# Altium PCB MSS_PCB.PcbDoc (part 2 of 2)
Units mm, origin at the board's own origin, x right, y up, seen from the top; angles counter-clockwise.
Board outline 160 x 110 mm, 4 copper layers (L1 (Signal), L2 (GND), L3 (GND), L4 (Signal)), stack 1.369 mm thick; 208 components, 129 nets, 584 pads, 198 vias.
Unrouted connection lines stored in the file: 1.
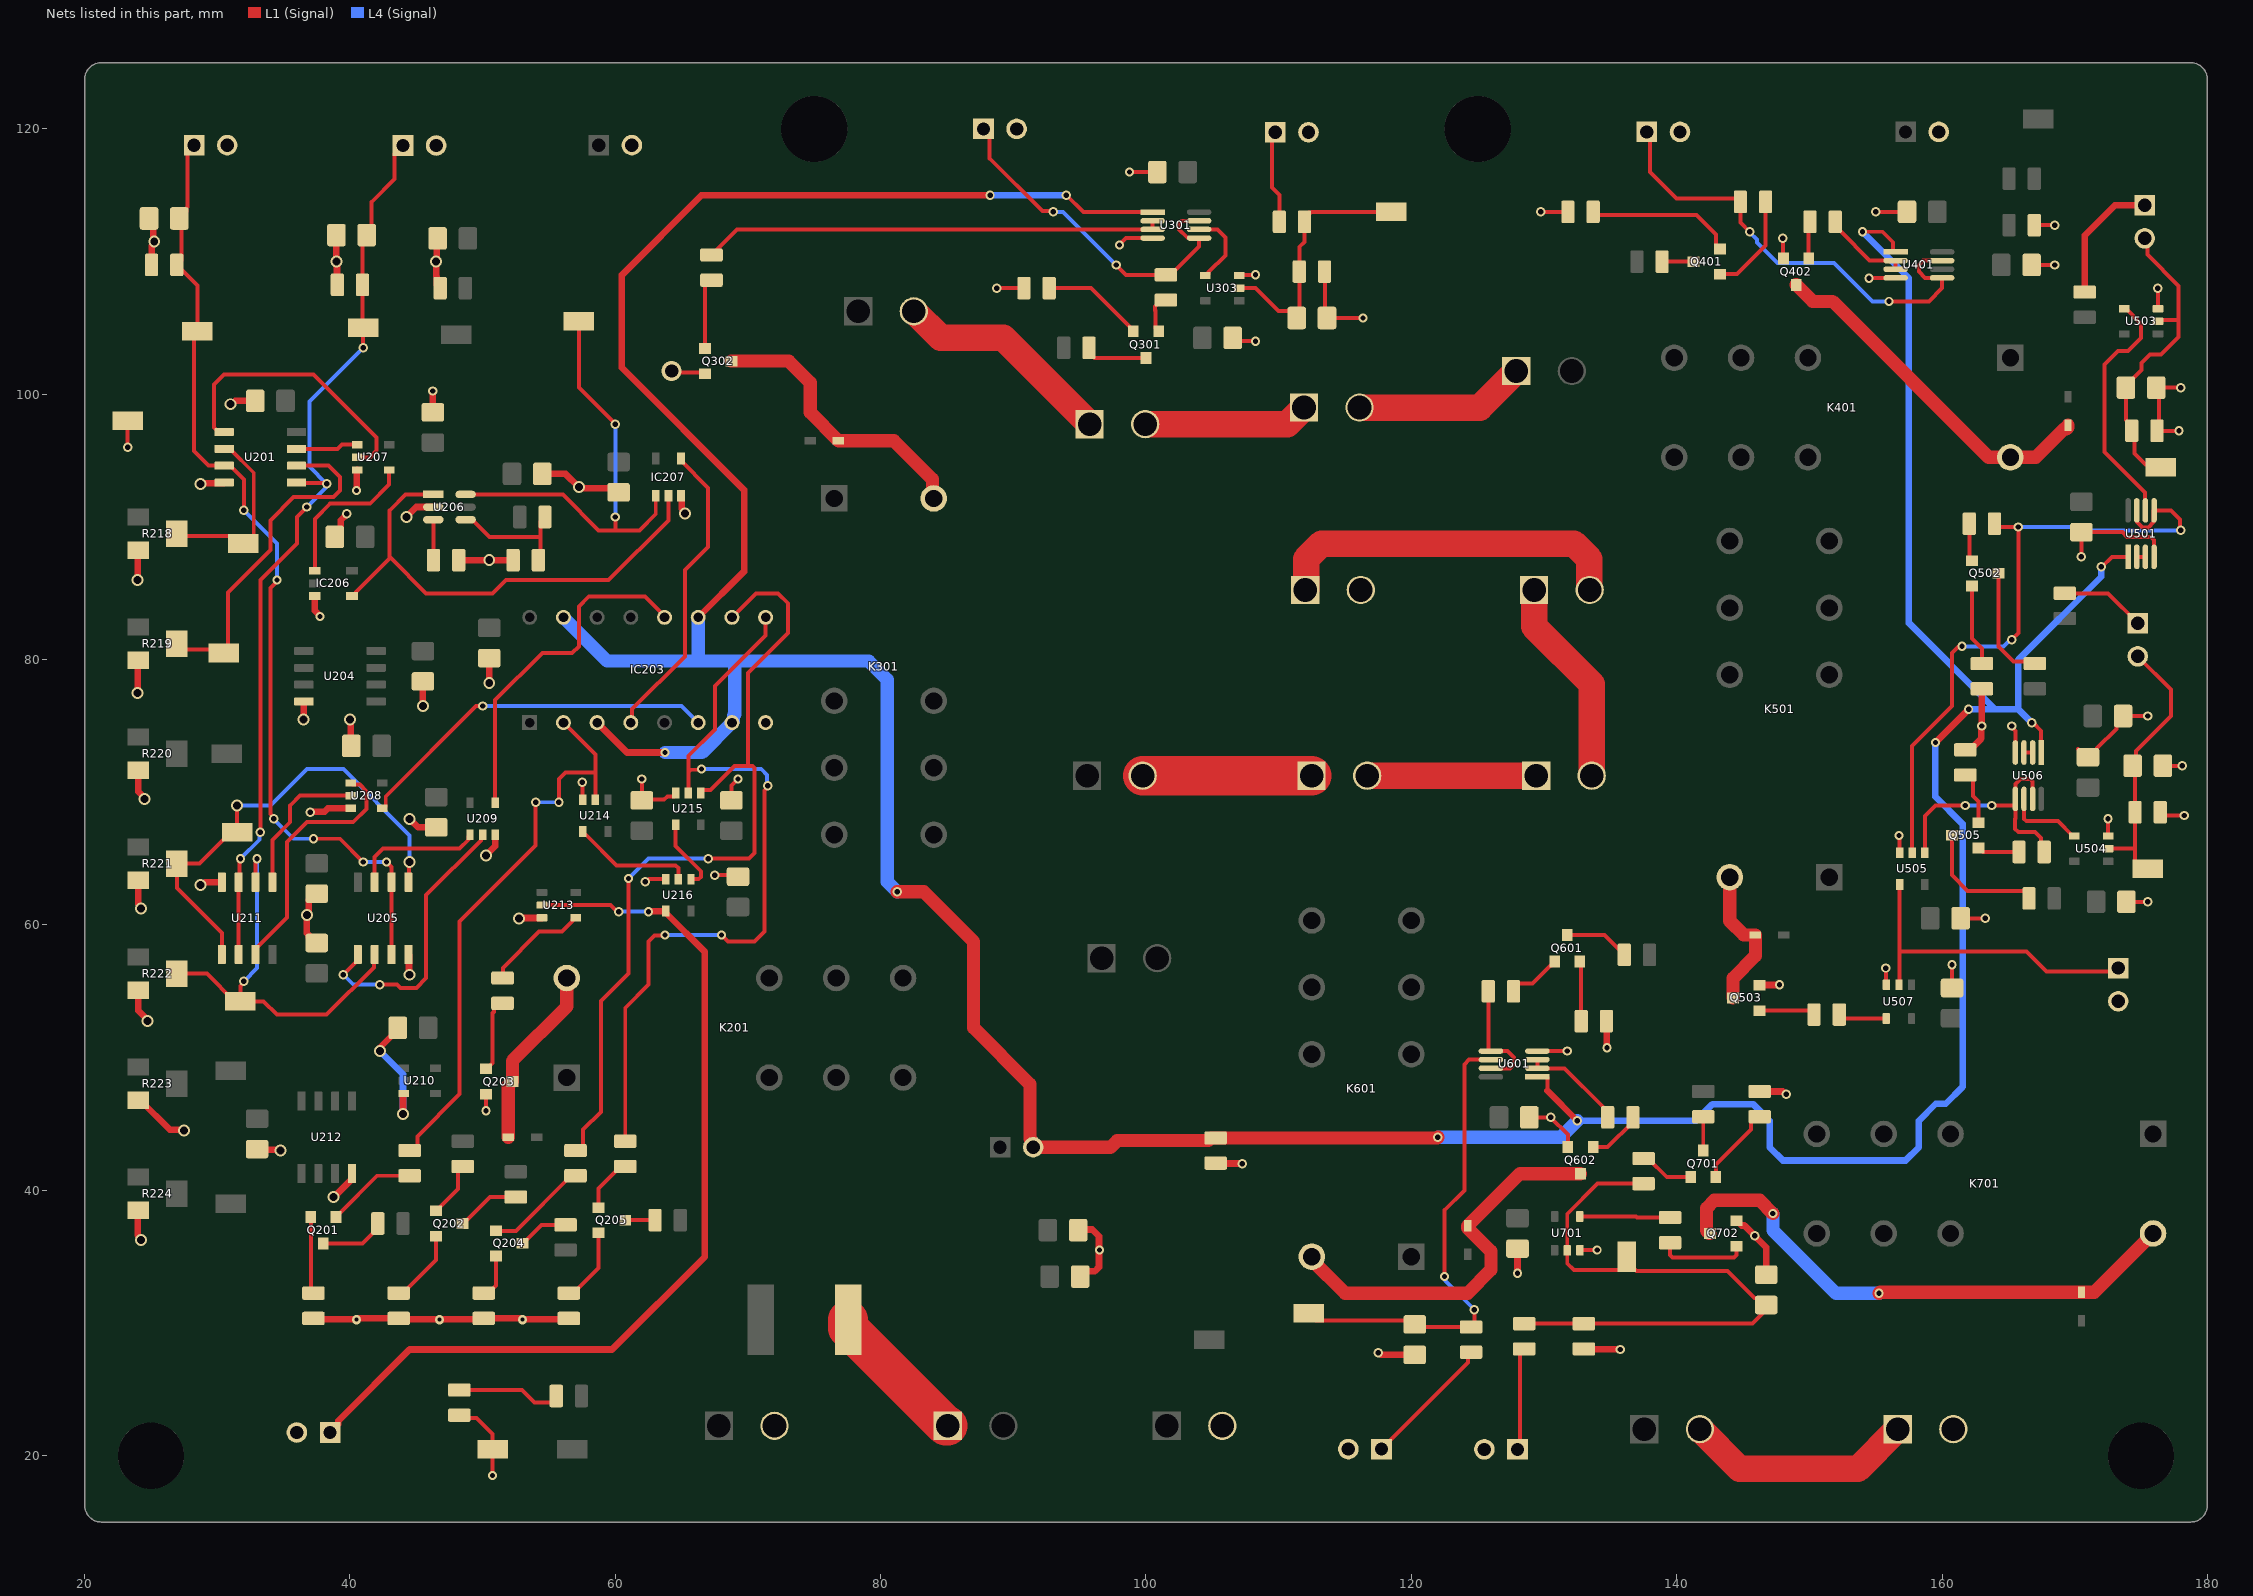
[diagram p4: the nets of this part, all layers, seen from the top]

## Via types
v1: diameter 0.7, hole 0.4, L1 (Signal) to L4 (Signal), tented both sides, 142 vias
v2: diameter 0.9, hole 0.6, L1 (Signal) to L4 (Signal), tented both sides, 49 vias
v3: diameter 1.5, hole 1, L1 (Signal) to L4 (Signal), tented both sides, 4 vias
v4: diameter 0.7, hole 0.3, L1 (Signal) to L4 (Signal), tented both sides, 3 vias

## Nets (pads, with @x,y where several pads share a name; then routed paths per layer and width w, separated by ;. In a path a pad name is that pad's centre, name@x,y a point inside that pad or via, vN(x,y) a via of type N, cw(c..) or ccw(c..) an arc to the next point about the centre after c; other vN are vias at no path point) (continued)
BRAKE_1_BAD: IC203.12 U209.4 | length 26.2
  L1 (Signal) w0.3: U209.4@50.95,69.2 50.95,76.95 54.5,80.5 56.75,80.5 57.25,81 57.25,84 58,84.75 62.25,84.75 63.71,83.29 IC203.12@63.71,83.19
BRAKE_1_BAD_LATCH: IC203.9 R210.2 U215.2 | length 59.1
  L1 (Signal) w0.3: R210.2@60.75,43.7 60.75,53.75 62.5,55.5 62.5,58.75 62.95,59.2 63.7,59.2 v1(63.75,59.25) ; U215.2@65.5,69.95 65.5,71.5 ; v1(66.5,71.75) 66.45,71.7 65.7,71.7 65.5,71.5 ; v1(68,59.25) 68.5,58.75 70.5,58.75 71.25,59.5 71.25,70.142 71.5,70.392 v1(71.5,70.5) ; IC203.9@71.33,83.19 71.33,81.83 67.5,78 67.5,74.75 65.5,72.75 65.5,71.5
  L4 (Signal) w0.3: v1(63.75,59.25) v1(68,59.25) ; v1(66.5,71.75) 71,71.75 71.45,71.3 71.45,70.55 v1(71.5,70.5)
BRAKE_1_OPEN: U205.1 U209.2 | length 21.5
  L1 (Signal) w0.3: v1(39.5,56.25) 39.5,56.255 40.595,57.35 U205.1@40.595,57.775 ; v1(42.25,55.5) 43.554,55.5 43.804,55.25 45,55.25 45.75,56 45.75,62.25 49.875,66.375 49.875,66.675 U209.2@50,66.8
  L4 (Signal) w0.3: v1(39.5,56.25) 40.25,55.5 v1(42.25,55.5)
BRAKE_1_REF: R218.2 TP204.1 U201.2 | length 14.4
  L1 (Signal) w0.3: U201.2@30.525,95.885 30.95,95.885 32.75,94.085 32.75,89.3 32.2,88.75 TP204.1@31.975,88.75 31.425,89.3 R218.2@27.15,89.3 ; R218.2@27.15,89.3 R218.2@26.95,89.5 R218.2@27.15,89.3
BRAKE_1_SHORT: U205.7 U209.1 | length 9.9
  L1 (Signal) w0.3: U205.7@41.865,63.225 41.865,65.115 42.5,65.75 48.25,65.75 48.925,66.425 48.925,66.675 U209.1@49.05,66.8
BRAKE_2_BAD: IC203.6 U208.4 | length 28
  L1 (Signal) w0.3: U208.4@42.45,68.8 42.575,68.8 42.7,68.925 42.7,69.7 49.491,76.491 49.991,76.491 v1(50,76.5)
  L4 (Signal) w0.3: v1(50,76.5) 65,76.5 IC203.6@66.25,75.25
BRAKE_2_BAD_LATCH: IC203.10 R208.2 U215.1 | length 62.8
  L1 (Signal) w0.3: R208.2@57,43 57.225,43 57.575,43.35 57.575,44.574 ; 57.574,44.574 58.906,45.906 58.906,54.257 61,56.351 v1(61,63.5) ; U215.1@66.45,69.95 66.45,70.055 66.575,70.18 67.18,70.18 69,72 70,72 ; v1(67,65) 70.074,65 70.5,65.426 70.5,71.824 70.324,72 70.25,72 70,72 ; IC203.10@68.79,83.19 70.6,85 72.25,85 73,84.25 73,82 70,79 70,72
  L4 (Signal) w0.3: v1(61,63.5) 62.5,65 v1(67,65)
BRAKE_2_OPEN: U208.2 U211.1 | length 11.2
  L1 (Signal) w0.3: U211.1@34.155,63.225 34.155,66.405 35.5,67.75 35.5,69 36.25,69.75 U208.2@40.05,69.75
BRAKE_2_REF: R219.2 TP205.1 U201.6 | length 26.3
  L1 (Signal) w0.3: R219.2@26.95,81.208 27.408,80.75 TP205.1@30.807,80.75 ; TP205.1@30.5,80.5 30.807,80.807 30.807,85.057 34,88.25 34,90.5 35.75,92.25 38.751,92.25 39.25,92.749 39.25,93.75 38.385,94.615 U201.6@35.975,94.615
BRAKE_2_SHORT: U208.1 U211.7 | length 19.3
  L1 (Signal) w0.3: U211.7@32.885,57.775 32.885,58.2 35.25,60.565 35.25,66.25 36.75,67.75 40.25,67.75 41.25,68.75 41.25,70.074 40.749,70.575 40.175,70.575 U208.1@40.05,70.7
BRAKE_MAX_REF: R222.2 TP208.1 U205.2 U211.2 | length 31.7
  L1 (Signal) w0.3: R222.2@26.95,56.333 29.217,56.333 31.3,54.25 TP208.1@31.75,54.25 ; v1(32,55.75) 32,55.642 31.75,55.392 TP208.1@31.75,54.25 ; U211.2@32.885,63.225 32.885,64.777 33,64.892 v1(33,65) ; U205.2@41.865,57.775 41.804,57.714 41.804,56.804 38.25,53.25 34.5,53.25 33.5,54.25 TP208.1@31.75,54.25
  L4 (Signal) w0.3: v1(32,55.75) 33,56.75 v1(33,65)
BRAKE_MIN_REF: R221.2 TP207.1 U205.5 U211.5 | length 36
  L1 (Signal) w0.3: U211.5@30.345,57.775 30.345,59.405 26.95,62.8 R221.2@26.95,64.625 28.675,64.625 31.05,67 TP207.1@31.5,67 ; v2(31.5,69) TP207.1@31.5,67 ; TP207.1@31.95,67 TP207.1@31.5,67 ; U205.5@44.405,63.225 44.452,63.272 44.452,64.703 v2(44.5,64.75)
  L4 (Signal) w0.3: v2(31.5,69) 34,69 36.75,71.75 39.5,71.75 44.5,66.75 v2(44.5,64.75)
BRAKE_SENSOR_1: C201.2 J201.1 R201.2 TP201.1 U201.3 U205.3 U205.6 | length 73.9
  L1 (Signal) w0.3: J201.1@28.25,118.775 27.75,118.775 27.75,114.126 27.678,114.053 27.678,113.785 C201.2@27.143,113.25 ; v1(32,91.25) 32,93.565 U201.3@30.95,94.615 ; v1(34.25,68) 34.25,68.108 34,68.358 34,85.392 34.5,85.892 v1(34.5,86) ; v1(37.25,66.5) 39.25,66.5 v1(41,64.75) ; v1(42.75,64.75) 43.135,64.365 U205.6@43.135,63.225 U205.3@43.135,57.775 ; C201.2@27.143,113.25 C201.2@27.3,113.093 ; C201.2@27.143,113.25 C201.2@27.3,113.093 ; C201.2@27.3,113.093 27.3,110.1 R201.2@26.95,109.75 28.5,108.2 TP201.1@28.5,104.75 28.25,104.5 28.25,95.715 29.35,94.615 U201.3@30.525,94.615 ; U201.3@30.525,94.615 U201.3@30.95,94.615 ; U201.3@30.525,94.615 U201.3@30.95,94.615
  L4 (Signal) w0.3: v1(32,91.25) 34.5,88.75 v1(34.5,86) ; v1(34.25,68) 35.75,66.5 v1(37.25,66.5) ; v1(41,64.75) v1(42.75,64.75)
BRAKE_SENSOR_2: C202.2 J202.1 R202.2 TP202.1 U201.5 U211.3 U211.6 | length 69.5
  L1 (Signal) w0.3: U211.6@31.615,57.775 U211.3@31.615,63.225 31.682,63.293 31.682,64.933 v1(31.75,65) ; v1(33.25,67) 33.25,86 36,88.75 36,90.75 v1(36.75,91.5) ; U201.5@35.975,93.345 36.022,93.297 38.202,93.297 v1(38.25,93.25) ; v1(41,103.5) TP202.1@41,105 40.95,105.05 R202.2@40.95,108.25 40.95,111.682 41.643,112.375 41.643,114.491 43.375,116.223 43.375,118.125 J202.1@44,118.75
  L4 (Signal) w0.3: v1(31.75,65) 33.173,66.423 33.173,66.923 v1(33.25,67) ; v1(36.75,91.5) 38.173,92.923 38.173,93.173 v1(38.25,93.25) 36.95,94.55 36.95,99.45 39.905,102.405 v1(41,103.5)
BSPD_CONFIRMED: IC203.4 IC207.4 | length 23.2
  L1 (Signal) w0.3: IC203.4@61.17,75.25 61.265,75.345 61.265,76.265 65.25,80.25 65.25,86.75 67,88.5 67,92.95 64.95,95 IC207.4@64.95,95.15
BSPD_DELAYED: IC207.1 TP211.1 U206.6 | length 34.2
  L1 (Signal) w0.3: U206.6@48.716,92.45 56.05,92.45 58.75,89.75 60,89.75 ; TP211.1@57.25,105.5 57.25,100.5 v1(60,97.75) ; v1(60,90.75) 60,89.75 ; IC207.1@63.05,92.35 63.05,90.976 61.824,89.75 60,89.75
  L4 (Signal) w0.3: v1(60,90.75) v1(60,97.75)
BSPD_FINAL: J204.1 U213.2 U216.4 | length 70.6
  L1 (Signal) w0.3: U213.2@54.475,61.5 59.642,61.5 60.142,61 v1(60.25,61)
  L1 (Signal) w0.5: J204.1@38.5,21.75 39.125,22.375 39.125,22.625 44.5,28 59.75,28 66.75,35 66.75,57.975 U216.4@63.8,60.925 ; v1(62.5,61) 62.525,61.025 63.775,61.025 U216.4@63.8,61.05
  L4 (Signal) w0.3: v1(60.25,61) v1(62.5,61)
BSPD_LATCHED: IC203.2 R204.2 U214.2 | length 43.6
  L1 (Signal) w0.3: R204.2@44.5,43 44.725,43 45.075,43.35 45.075,44.075 48.25,47.25 48.25,60.25 54,66 v1(54,69.25) ; v1(55.75,69.25) 55.75,71 56.25,71.5 58.5,71.5 ; IC203.2@56.09,75.25 58.5,72.84 58.5,71.5 ; U214.2@58.5,69.45 58.5,71.5
  L4 (Signal) w0.3: v1(54,69.25) v1(55.75,69.25)
BSPD_OUT: IC206.4 IC207.2 U206.1 | length 37.7
  L1 (Signal) w0.3: IC206.4@40.15,84.8 40.3,84.8 40.45,84.95 40.45,85.1 42.943,87.593 43,87.65 ; U206.1@46.284,92.45 44.2,92.45 43,91.25 43,87.65 ; IC207.2@64,92.35 64,90.5 59.5,86 51.75,86 50.75,85 45.75,85 43.1,87.65 43,87.65
ECU_FAULT: J601.1 R603.1 | length 10.1
  L1 (Signal) w0.3: J601.1@117.75,20.5 122.039,24.789 124.276,27.026 124.276,27.576 R603.1@124.5,27.8
ECU_PROCESSED: C602.2 R603.2 TP601.1 U601.6 | length 36.4
  L1 (Signal) w0.3: TP601.1@112.25,30.75 112.8,30.2 119.943,30.2 120.443,29.7 R603.2@124.85,29.7 ; v1(122.5,33.5) 122.5,38.5 124,40 124,49.5 124.35,49.85 U601.6@125.999,49.85 ; R603.2@124.75,29.8 v1(124.75,31)
  L4 (Signal) w0.3: v1(122.5,33.5) 122.577,33.423 122.577,33.173 v1(124.75,31)
GND: C103.1 C104.1 C201.1 C202.1 C203.1 C205.1 C206.1 C207.1 C208.1 C209.1 C210.1 C211.1 C212.1 C213.1 C214.1 C215.1 C216.1 C217.2 C218.2 C219.2 C220.2 C301.1 C302.2 C303.2 C401.1 C402.2 C501.1 C502.1 C503.1 C504.1 C505.1 C506.1 C507.1 C508.1 C601.1 C602.1 C701.1 C702.1 D201.K D202.K D203.K D204.K D301.K D401.K D501.K D502.K D601.K D701.K IC203.8 IC206.3 IC207.3 J112.2 J114.2 J115.2 J116.2 J201.2 J202.2 J203.2 J204.2 J301.2 J302.2 J401.2 J402.2 J503.2 J601.2 J701.2 Q203.2 Q302.2 Q402.2 Q503.2 Q602.2 Q702.2 R101.1 R102.1 R201.1 R202.1 R203.1 R213.2 R214.1 R218.3 R219.3 R220.3 R221.3 R222.3 R223.3 R224.3 R302.1 R402.1 R501.1 R502.1 R703.1 TP103.1 TP104.1 U201.4 U204.4 U205.4 U206.2 U207.3 U208.3 U209.3 U210.3 U211.4 U212.4 U213.3 U214.3 U215.3 U216.3 U301.4 U303.3 U401.4 U501.4 U503.3 U504.3 U505.3 U506.4 U507.3 U601.4 U701.3 | length 241.2
  L1 (Signal) w0.3: v1(23.25,96) TP104.1@23.25,98 ; R101.1@48.25,23.05 48.45,22.85 49.55,22.85 50.75,21.65 TP103.1@50.75,20.5 ; v1(50.25,46) Q203.2@50.25,47.25 ; v1(50.75,18.5) 50.75,20.25 TP103.1@51,20.5 ; v1(57.5,70.75) 57.525,70.725 57.525,69.475 U214.3@57.55,69.45 ; v1(62,71) 62,69.507 62.057,69.45 63.675,69.45 63.925,69.7 64.425,69.7 64.55,69.825 U215.3@64.55,69.95 ; v1(62.25,63.25) 62.358,63.25 62.558,63.45 U216.3@63.8,63.45 ; v3(64.25,101.75) 64.35,101.65 66.65,101.65 Q302.2@66.75,101.55 ; v1(67.5,63.75) 69.143,63.75 C220.2@69.25,63.643 ; C218.2@68.75,69.393 68.75,70.5 v1(69.25,71) ; v1(88.75,108) D301.K@90.8,108 ; v1(98,111.25) 98,111.275 98.5,111.775 U301.4@100.5,111.775 ; v1(98.75,116.75) C303.2@100.857,116.75 ; C302.2@106.536,104.25 106.786,104 v1(108.25,104) ; U303.3@107.025,108.95 107.05,108.975 108.225,108.975 v1(108.25,109) ; R302.1@113.45,109.25 113.486,109.214 113.486,105.907 C301.1@113.643,105.75 v1(116.357,105.75) ; C601.1@128.893,45.5 v1(130.5,45.5) 131.8,44.2 Q602.2@131.8,43.25 ; U601.4@129.5,50.5 v1(131.75,50.5) ; v1(129.75,113.75) D401.K@131.8,113.75 ; U701.3@132.7,35.475 132.712,35.488 133.987,35.488 v1(134,35.5) ; v1(148,111.75) 148.025,111.725 148.025,110.275 Q402.2@148.05,110.25 ; v1(154.5,108.75) 154.512,108.763 156.487,108.763 U401.4@156.5,108.775 ; v1(155,113.75) C402.2@157.357,113.75 ; v1(155.75,56.75) 155.775,56.725 155.775,55.525 U507.3@155.8,55.5 ; v1(156.75,66.75) 156.775,66.725 156.775,65.475 U505.3@156.8,65.45 ; C508.1@160.75,55.25 v1(160.75,57) ; C507.1@161.393,60.5 v1(163.25,60.5) ; v1(165.25,75) 165.25,74.892 165.525,74.617 U506.4@165.525,73 ; C401.1@166.75,109.75 v1(168.5,109.75) ; R402.1@166.95,112.75 v1(168.5,112.75) ; C506.1@170.229,73.25 170.836,72.643 171.136,72.643 171.685,73.191 171.685,73.328 173.133,74.776 173.133,75.24 C503.1@173.643,75.75 v1(175.5,75.75) ; v1(170.5,87.75) C504.1@170.5,89.607 173.587,89.607 173.944,89.25 175.75,89.25 175.975,89.025 U501.4@175.975,87.75 ; v1(172.5,68) 172.512,67.988 172.512,66.713 U504.3@172.525,66.7 ; C505.1@173.893,61.75 v1(175.5,61.75) ; C501.1@176.143,100.5 C501.1@176.343,100.5 ; v1(176.25,108) 176.262,107.988 176.262,106.462 U503.3@176.275,106.45 ; R502.1@176.45,68.5 176.7,68.25 v1(178.25,68.25) ; C502.1@176.643,72 v1(178.107,72) ; v1(177.857,97.25) R501.1@176.2,97.25 176.343,97.393 C501.1@176.343,100.5 ; v1(178,100.5) C501.1@176.343,100.5
  L1 (Signal) w0.5: v2(24,77.5) 24,79.908 R219.3@24.05,79.958 ; v2(24,86) 24,88.2 R218.3@24.05,88.25 ; R224.3@24.05,38.5 24,38.45 24,36.608 24.25,36.358 v2(24.25,36.25) ; R223.3@24.05,46.792 24.2,46.792 26.415,44.577 27.423,44.577 v2(27.5,44.5) ; R222.3@24.05,55.083 24.05,53.558 24.75,52.858 v2(24.75,52.75) ; R221.3@24.05,63.375 24.05,61.558 24.25,61.358 v2(24.25,61.25) ; R220.3@24.05,71.667 24.05,70.058 24.5,69.608 v2(24.5,69.5) ; C201.1@24.857,113.25 25.173,112.934 25.173,111.577 25.327,111.423 25.282,111.423 25.05,111.192 R201.1@25.05,109.75 ; v2(28.75,63) 28.858,63 29.083,63.225 U211.4@30.345,63.225 ; v2(28.75,93.25) 28.797,93.297 30.477,93.297 U201.4@30.525,93.345 ; v2(31,99.25) 31.108,99.25 31.358,99.5 C205.1@32.857,99.5 ; C213.1@33,43.107 33.053,43.054 34.696,43.054 v2(34.75,43) ; v2(36.5,75.5) 36.512,75.513 36.512,76.833 U204.4@36.525,76.845 ; v1(37,68.5) 37.038,68.538 38.088,68.538 38.35,68.8 U208.3@40.05,68.8 ; D201.K@37.25,30.35 37.312,30.288 40.462,30.288 v4(40.5,30.25) 40.554,30.25 40.654,30.35 D202.K@43.667,30.35 43.728,30.288 46.712,30.288 v4(46.75,30.25) 46.788,30.288 50.022,30.288 D203.K@50.083,30.35 52.846,30.35 52.946,30.25 v4(53,30.25) 53.038,30.288 56.438,30.288 D204.K@56.5,30.35 ; IC206.3@37.35,84.8 37.35,83.704 37.75,83.304 v1(37.75,83.25) ; C211.1@37.5,58.643 37.35,58.643 36.9,59.093 36.9,59.243 36.75,59.393 36.75,60.858 36.9,61.008 36.9,61.907 37.35,62.357 C212.1@37.5,62.357 ; v2(38.75,39.5) 38.805,39.5 40.155,40.85 U212.4@40.155,41.275 ; C207.1@38.857,89.25 39.307,89.7 39.307,90.503 39.75,90.946 v1(39.75,91) ; C202.1@38.982,112 38.982,110.268 39,110.25 v2(39,110) 39.025,109.975 39.025,108.275 R202.1@39.05,108.25 ; v2(40,75.5) 40.053,75.447 40.053,73.554 C214.1@40.107,73.5 ; v1(40.5,92.75) 40.525,92.775 40.525,94.275 U207.3@40.55,94.3 ; v2(42.25,50.5) 42.327,50.577 42.327,50.82 43.607,52.1 C216.1@43.607,52.25 ; v2(44,45.75) 44,47.275 44.025,47.3 U210.3@44.05,47.3 ; v2(44.25,90.75) 45,91.5 U206.2@46.284,91.5 ; U205.4@44.405,57.775 44.452,57.727 44.452,56.297 v2(44.5,56.25) ; v2(44.5,68) 45.143,67.357 C215.1@46.5,67.357 ; v2(45.5,76.5) C208.1@45.5,78.357 ; C206.1@46.25,98.643 v1(46.25,100.25) ; C203.1@46.607,111.75 46.553,111.697 46.553,110.053 v2(46.5,110) 46.5,108.893 46.55,108.843 46.55,108.25 R203.1@46.8,108 ; R214.1@48.2,87.5 v2(50.5,87.5) R213.2@52.3,87.5 ; v2(50.25,65.25) 50.95,65.95 U209.3@50.95,66.8 ; v2(50.5,78.25) C217.2@50.5,80.107 ; v2(52.75,60.5) 52.775,60.525 54.45,60.525 U213.3@54.475,60.55 ; C209.1@54.5,94 56.25,94 v2(57.25,93) 57.327,92.923 59.934,92.923 C210.1@60.25,92.607 ; IC207.3@64.95,92.35 65,92.3 65,91.358 65.25,91.108 v2(65.25,91) ; C104.1@94.893,37 C104.1@95.143,37 ; C103.1@95.036,33.5 95.433,33.897 96.147,33.897 96.462,34.212 96.462,36.538 95.951,37.049 95.343,37.049 C104.1@95.143,37.25 ; R102.1@105.25,42.05 105.275,42.025 107.225,42.025 v1(107.25,42) ; v1(117.5,27.75) 117.554,27.75 117.697,27.607 C602.1@120.25,27.607 ; v1(128,33.75) C702.1@128,35.607 ; R703.1@133,28.05 133.025,28.025 135.725,28.025 v1(135.75,28) ; D601.K@134.7,52.75 134.725,52.725 134.725,50.775 v1(134.75,50.75) ; Q702.2@144.5,37.7 144.55,37.7 144.901,37.349 145.098,37.349 146.75,35.697 C701.1@146.75,33.643 ; D701.K@146.25,47.45 147.996,47.45 148.196,47.25 v1(148.25,47.25) ; Q503.2@146.25,55.45 146.275,55.475 147.725,55.475 v1(147.75,55.5) ; D502.K@161.75,73.2 162.1,73.2 162.962,74.062 162.962,74.962 v1(163,75) D501.K@163,77.8
  L4 (Signal) w0.5: v2(42.25,50.5) 44,48.75 v2(44,45.75)
  other v1: 96.5,35.5 145.876,36.572
  other v2: 36.75,60.75 25.25,111.5
HARD_BRAKE: IC206.1 U207.4 | length 11.7
  L1 (Signal) w0.3: IC206.1@37.35,86.7 37.35,90.6 38.5,91.75 41.5,91.75 42.95,93.2 U207.4@42.95,94.3
IMD_FIL: C301.2 R301.2 R302.2 TP301.1 U303.2 | length 19.9
  L1 (Signal) w0.3: U303.2@107.025,108 108.25,108 109.975,106.275 110.832,106.275 C301.2@111.357,105.75 111.586,105.979 111.586,109.214 R302.2@111.55,109.25 111.586,109.286 111.586,111.118 111.95,111.482 111.95,113.35 112.3,113.7 112.426,113.7 112.476,113.75 TP301.1@118.5,113.75
IMD_IN: J301.1 R301.1 | length 7.1
  L1 (Signal) w0.3: J301.1@109.75,119.75 109.5,119.5 109.5,115.571 110.05,115.021 R301.1@110.05,113
IMD_NFIL: U301.6 U303.4 | length 5.8
  L1 (Signal) w0.3: U301.6@104,112.425 105.377,112.425 106,111.802 106,110.475 104.725,109.2 104.725,109.075 104.6,108.95 U303.4@104.475,108.95
INV_LATCHED_AMS: R405.1 U401.2 U401.3 | length 6.6
  L1 (Signal) w0.3: R405.1@151.95,113 151.95,112.65 152.3,112.3 152.335,112.3 154.538,110.097 156.477,110.097 U401.2@156.5,110.075 U401.3@156.5,109.425
INV_LATCHED_ECU: R604.1 U601.2 U601.3 | length 7.7
  L1 (Signal) w0.3: U601.3@129.5,49.85 U601.2@129.5,49.2 131.55,49.2 134.45,46.3 134.45,45.85 R604.1@134.8,45.5
INV_LATCHED_IMD: R305.1 U301.2 U301.3 | length 34.7
  L1 (Signal) w0.3: R305.1@67.25,110.5 69.175,112.425 U301.3@100.5,112.425 U301.2@100.5,113.075
INV_PRECHARGE: R704.1 U701.4 | length 6.8
  L1 (Signal) w0.3: U701.4@132.7,38.025 136.94,38.025 137.015,37.95 R704.1@139.5,37.95
LATCHED_AMS: J402.1 R403.2 U401.5 U401.7 | length 35.7
  L1 (Signal) w0.3: J402.1@137.75,119.775 137.996,119.529 137.996,116.754 140,114.75 144.55,114.75 R403.2@144.8,114.5 144.8,112.95 v1(145.5,112.25) ; v1(156,107) 159,107 160,108 U401.5@160,108.775 159.281,108.775 158.725,108.775 158.25,109.25 158.25,109.75 158.575,110.075 U401.7@160,110.075
  L4 (Signal) w0.3: v1(145.5,112.25) 145.5,112.212 146.047,111.665 146.047,111.453 147.6,109.9 151.85,109.9 154.75,107 v1(156,107)
LATCHED_ECU: R602.2 U601.5 U601.7 | length 9
  L1 (Signal) w0.3: R602.2@125.8,55 125.8,50.554 125.854,50.5 U601.5@125.999,50.5 127.25,50.5 127.75,50 127.75,49.5 127.45,49.2 U601.7@125.999,49.2
LATCHED_IMD: J302.1 R303.2 U301.5 U301.7 | length 27.2
  L1 (Signal) w0.3: J302.1@87.75,120 88.222,119.528 88.222,117.778 92.2,113.8 92.95,113.8 v1(93,113.75) ; v1(97.75,109.75) 98.5,109 101.85,109 104,111.15 U301.5@104,111.775 103.978,111.797 103.12,111.797 102.5,112.417 102.5,112.899 102.676,113.075 U301.7@104,113.075
  L4 (Signal) w0.3: v1(93,113.75) 93.75,113.75 v1(97.75,109.75)
LATCHED_PDOC1: R503.2 U501.5 U501.7 U505.2 | length 50.6
  L1 (Signal) w0.3: U505.2@157.75,65.45 157.75,73.5 160.75,76.5 160.75,80.5 161.25,81 v1(161.5,81) ; R503.2@163.95,90.25 164.2,90 v1(165.75,90) 165.75,82 v1(165.25,81.5) ; U501.7@174.675,91.25 174.697,91.228 174.697,90.37 175.094,89.973 175.556,89.973 175.953,90.37 175.953,91.228 U501.5@175.975,91.25 177.25,91.25 177.95,90.55 177.95,89.8 v1(178,89.75)
  L4 (Signal) w0.3: v1(161.5,81) 164.642,81 165.142,81.5 v1(165.25,81.5) ; v1(165.75,90) 169.94,90 170.19,89.75 v1(178,89.75)
LATCHED_PDOC2: R505.2 U505.1 U506.5 U506.7 | length 19.5
  L1 (Signal) w0.3: U505.1@158.7,65.45 158.7,68.2 159.5,69 v1(161.75,69) ; v1(163.75,69) 165.471,69 U506.5@165.525,69.054 ; U506.7@166.825,69.5 166.825,70.824 166.649,71 165.926,71 165.547,70.621 165.547,69.522 U506.5@165.525,69.5 U506.5@165.525,69.054 ; R505.2@167.7,65.5 167.443,65.757 167.443,66.557 167,67 165.75,67 165.5,67.25 165.5,67.987 165.525,68.012 U506.5@165.525,69.054
  L4 (Signal) w0.3: v1(161.75,69) v1(163.75,69)
NetD101_K: D101.K R101.2 | length 8
  L1 (Signal) w0.3: R101.2@48.25,24.95 52.975,24.95 53.925,24 55.2,24 55.55,24.35 D101.K@55.55,24.5
NetD201_A: D201.A Q201.2 | length 5.8
  L1 (Signal) w0.3: Q201.2@37.05,38 37.05,32.45 D201.A@37.25,32.25
NetD202_A: D202.A Q202.2 | length 5.7
  L1 (Signal) w0.3: D202.A@43.667,32.25 44.017,32.25 46.5,34.733 Q202.2@46.5,36.55
NetD203_A: D203.A Q204.2 | length 3.4
  L1 (Signal) w0.3: D203.A@50.083,32.25 50.433,32.25 51,32.817 Q204.2@51,35.05
NetD204_A: D204.A Q205.2 | length 5.7
  L1 (Signal) w0.3: D204.A@56.5,32.25 56.85,32.25 58.75,34.15 Q205.2@58.75,36.8
NetD301_A: D301.A Q301.2 | length 7.7
  L1 (Signal) w0.3: D301.A@92.7,108 95.85,108 99.05,104.8 Q301.2@99.05,104.75
NetD401_A: D401.A Q401.2 | length 11.2
  L1 (Signal) w0.3: D401.A@133.7,113.75 133.95,113.5 141.5,113.5 142.957,112.043 142.957,111.2 143.207,110.95 Q401.2@143.25,110.95
NetD501_A: D501.A Q502.2 | length 6.2
  L1 (Signal) w0.3: Q502.2@162.25,85.55 162.25,81.6 163,80.85 D501.A@163,79.7
NetD502_A: D502.A Q505.2 | length 4.1
  L1 (Signal) w0.3: D502.A@161.75,71.3 161.975,71.3 162.325,70.95 162.325,69.725 162.75,69.3 Q505.2@162.75,67.7
NetD601_A: D601.A Q601.2 | length 4.5
  L1 (Signal) w0.3: Q601.2@132.7,57.25 132.8,57.15 D601.A@132.8,52.75
NetD701_A: D701.A Q701.2 | length 6.1
  L1 (Signal) w0.3: Q701.2@142.95,41 142.95,41.95 145.6,44.6 145.6,45.2 145.95,45.55 D701.A@146.25,45.55
NetF101_2: F101.2 J101.1 | length 11.2
  L1 (Signal) w3: F101.2@77.55,30.25 77.55,29.6 84.9,22.25 J101.1@85.06,22.25
NetJ102_2: J102.2 J103.1 | length 16.8
  L1 (Signal) w2: J102.2@82.5,106.25 82.535,106.25 84.535,104.25 89.25,104.25 J103.1@95.75,97.75
NetJ103_2: J103.2 J104.1 | length 12.5
  L1 (Signal) w2: J103.2@99.94,97.75 110.655,97.75 J104.1@111.905,99
NetJ104_2: J104.2 J105.1 | length 12.9
  L1 (Signal) w2: J104.2@116.095,99 125.155,99 J105.1@127.905,101.75
NetJ108_2: J108.2 J109.1 | length 12.7
  L1 (Signal) w3: J108.2@99.75,71.25 J109.1@112.483,71.25
NetJ109_2: J109.2 J110.1 | length 12.7
  L1 (Signal) w2: J109.2@116.672,71.25 J110.1@129.405,71.25
NetJ110_2: J110.2 J111.1 | length 15.8
  L1 (Signal) w2: J111.1@129.25,85.25 129.25,82.5 133.595,78.155 J110.2@133.595,71.25
NetJ111_2: J111.2 J112.1 | length 27
  L1 (Signal) w2: J112.1@112,85.25 112.065,85.315 112.065,87.578 113.237,88.75 132.244,88.75 133.415,87.578 133.415,85.275 J111.2@133.44,85.25
NetJ113_2: J113.2 J114.1 | length 17.4
  L1 (Signal) w2: J113.2@141.75,22 144.75,19 153.655,19 J114.1@156.655,22
NetJ501_1: J501.1 R510.1 | length 9.7
  L1 (Signal) w0.5: R510.1@170.75,107.7 170.75,111.975 173.025,114.25 J501.1@175.275,114.25
NetJ502_1: J502.1 R511.1 | length 6.4
  L1 (Signal) w0.3: R511.1@169.25,85 172.5,85 J502.1@174.75,82.75
NetK201_A2: K201.A2 Q203.3 U203.2 | length 13.9
  L1 (Signal) w1: U203.2@51.93,44 51.93,47.93 52.2,48.2 Q203.3@52.25,48.2 52.25,49.75 56.35,53.85 K201.A2@56.35,56
NetK301_A2: K301.A2 Q302.3 U302.2 | length 21.6
  L1 (Signal) w1: Q302.3@68.75,102.5 73.07,102.5 74.686,100.884 74.686,98.634 U302.2@76.82,96.5 81,96.5 83.907,93.593 83.907,92.243 K301.A2@84,92.15
NetK401_A2: K401.A2 Q402.3 U402.2 | length 27
  L1 (Signal) w1: Q402.3@149,108.25 150.25,107 151.75,107 163.5,95.25 K401.A2@165.15,95.25 167.07,95.25 169.22,97.4 169.38,97.4 169.5,97.52 U402.2@169.5,97.68
NetK501_A2: K501.A2 Q503.3 U502.2 | length 11.1
  L1 (Signal) w1: K501.A2@144,63.6 144,60.3 145.05,59.25 U502.2@145.93,59.25 145.93,57.68 144.25,56 Q503.3@144.25,54.5
NetK601_A2: K601.A2 Q602.3 U602.2 | length 29.7
  L1 (Signal) w1: K601.A2@112.5,35 112.5,34.75 115,32.25 124.25,32.25 126,34 126,35.41 124.25,37.16 U602.2@124.25,37.32 128.18,41.25 Q602.3@132.75,41.25
NetK701_A2: K701.A2 Q702.3 U702.2 | length 41.4
  L1 (Signal) w1: Q702.3@142.5,36.75 142.45,36.75 142.3,36.9 142.3,36.95 142.25,37 142.25,38.664 142.836,39.25 146.25,39.25 v1(147.25,38.25) ; v1(155.25,32.25) 155.32,32.32 171.47,32.32 K701.A2@175.9,36.75
  L4 (Signal) w1: v1(147.25,38.25) 147.25,37 152,32.25 v1(155.25,32.25)
NetQ201_1: Q201.1 R204.1 | length 6.9
  L1 (Signal) w0.3: Q201.1@38.95,38 38.95,38.05 39.2,38.3 39.25,38.3 42.05,41.1 R204.1@44.5,41.1
NetQ201_3: Q201.3 R205.1 | length 4.9
  L1 (Signal) w0.3: Q201.3@38,36 40.95,36 42.1,37.15 R205.1@42.1,37.5
NetQ202_1: Q202.1 R206.1 | length 4.2
  L1 (Signal) w0.3: Q202.1@46.5,38.45 46.55,38.45 46.8,38.7 46.8,38.75 48.15,40.1 48.15,41.45 R206.1@48.5,41.8
NetQ202_3: Q202.3 R207.1 | length 4.8
  L1 (Signal) w0.3: Q202.3@48.5,37.5 48.55,37.5 50.55,39.5 R207.1@52.5,39.5
NetQ203_1: Q203.1 R215.2 | length 5.7
  L1 (Signal) w0.3: Q203.1@50.25,49.15 50.3,49.15 50.75,49.6 50.75,53.35 50.843,53.443 50.843,53.75 51.193,54.1 R215.2@51.5,54.1
NetQ204_1: Q204.1 R208.1 | length 7.7
  L1 (Signal) w0.3: Q204.1@51,36.95 52.5,36.95 56.65,41.1 R208.1@57,41.1
NetQ204_3: Q204.3 R209.1 | length 3.8
  L1 (Signal) w0.3: Q204.3@53,36 53.05,36 54.45,37.4 R209.1@56.25,37.4
NetQ205_1: Q205.1 R210.1 | length 4.1
  L1 (Signal) w0.3: Q205.1@58.75,38.7 58.75,40.15 60.4,41.8 R210.1@60.75,41.8
NetQ205_3: Q205.3 R211.1 | length 2.3
  L1 (Signal) w0.3: Q205.3@60.75,37.75 R211.1@63,37.75
NetQ301_1: Q301.1 R303.1 | length 3
  L1 (Signal) w0.3: Q301.1@100.95,104.75 100.7,105 100.7,106.3 100.674,106.326 100.674,106.624 101.15,107.1 R303.1@101.5,107.1
NetQ301_3: Q301.3 R304.1 | length 4.8
  L1 (Signal) w0.3: R304.1@95.7,103.5 95.7,103.15 96.1,102.75 Q301.3@100,102.75
NetQ302_1: Q302.1 R305.2 | length 5.4
  L1 (Signal) w0.3: Q302.1@66.75,103.45 66.75,108.25 67.1,108.6 R305.2@67.25,108.6
NetQ401_1: Q401.1 R403.1 | length 7.6
  L1 (Signal) w0.3: Q401.1@143.25,109.05 144.55,109.05 146.7,111.2 R403.1@146.7,114.5
NetQ401_3: Q401.3 R404.1 | length 2.3
  L1 (Signal) w0.3: R404.1@138.9,110 Q401.3@141.25,110
NetQ402_1: Q402.1 R405.2 | length 2.8
  L1 (Signal) w0.3: Q402.1@149.95,110.25 149.95,112.85 149.95,112.9 R405.2@150.05,113
NetQ502_1: Q502.1 R503.1 | length 2.9
  L1 (Signal) w0.3: R503.1@162.05,90.25 162.05,87.65 Q502.1@162.25,87.45
NetQ502_3: Q502.3 R504.1 | length 8.8
  L1 (Signal) w0.3: Q502.3@164.25,86.5 164.25,83.25 164.25,81 165.376,79.874 166.826,79.874 R504.1@167,79.7
NetQ503_1: Q503.1 R507.2 | length 4.2
  L1 (Signal) w0.3: Q503.1@146.25,53.55 150.05,53.55 R507.2@150.35,53.25
NetQ505_1: Q505.1 R505.1 | length 3.2
  L1 (Signal) w0.3: Q505.1@162.75,65.8 162.8,65.8 163.1,65.5 R505.1@165.8,65.5
NetQ505_3: Q505.3 R506.1 | length 9.7
  L1 (Signal) w0.3: Q505.3@160.75,66.75 160.75,63.75 161.925,62.575 166.2,62.575 166.55,62.225 R506.1@166.55,62
NetQ601_1: Q601.1 R602.1 | length 4.2
  L1 (Signal) w0.3: R602.1@127.7,55 127.7,55.225 128.05,55.575 129.125,55.575 130.5,56.95 130.55,56.95 130.8,57.2 Q601.1@130.8,57.25
NetQ601_3: Q601.3 R601.1 | length 4.9
  L1 (Signal) w0.3: Q601.3@131.75,59.25 134.55,59.25 R601.1@136.05,57.75
NetQ602_1: Q602.1 R604.2 | length 4.1
  L1 (Signal) w0.3: Q602.1@133.7,43.25 134.8,43.25 136.7,45.15 R604.2@136.7,45.5
NetQ701_1: Q701.1 R705.1 | length 4.1
  L1 (Signal) w0.3: R705.1@137.5,42.4 137.85,42.4 139.25,41 Q701.1@141.05,41
NetQ701_3: Q701.3 R701.1 | length 2.5
  L1 (Signal) w0.3: Q701.3@142,43 R701.1@142,45.55
NetQ702_1: Q702.1 R704.2 | length 6.7
  L1 (Signal) w0.3: R704.2@139.5,36.05 139.5,35.126 139.676,34.95 144.324,34.95 144.5,35.126 Q702.1@144.5,35.8
NetR212_1: R212.1 R213.1 U206.4 | length 9.6
  L1 (Signal) w0.3: U206.4@48.716,90.55 49.202,90.55 50.502,89.25 54.35,89.25 ; R213.1@54.2,87.5 54.35,87.65 54.35,89.25 ; R212.1@54.7,90.75 54.35,90.4 54.35,89.25
NetR214_2: R214.2 U206.3 | length 3.1
  L1 (Signal) w0.3: U206.3@46.284,90.55 46.3,90.535 R214.2@46.3,87.5
NetR215_1: R215.1 U213.4 | length 7.9
  L1 (Signal) w0.3: R215.1@51.5,56 51.524,56.024 51.524,56.774 54.25,59.5 55.975,59.5 56.775,60.3 56.775,60.425 56.9,60.55 U213.4@57.025,60.55
NetR507_1: R507.1 U507.4 | length 3.7
  L1 (Signal) w0.3: R507.1@152.25,53.25 152.55,52.95 U507.4@155.8,52.95
NetU201_1: U201.1 U207.2 | length 21.4
  L1 (Signal) w0.3: U201.1@30.525,97.155 30.375,97.305 29.945,97.305 29.75,97.5 29.75,100.75 30.5,101.5 37.25,101.5 42,96.75 42,95.75 41.5,95.25 U207.2@40.55,95.25
NetU201_7: U201.7 U207.1 | length 4.7
  L1 (Signal) w0.3: U201.7@35.975,95.885 39.072,95.885 39.387,96.2 U207.1@40.55,96.2
NetU214_4: U214.4 U216.2 | length 9.3
  L1 (Signal) w0.3: U214.4@57.55,67.05 57.55,66.925 57.675,66.8 57.8,66.8 60.1,64.5 64.55,64.5 64.75,64.3 U216.2@64.75,63.45
NetU215_4: U215.4 U216.1 | length 5.5
  L1 (Signal) w0.3: U215.4@64.55,67.55 64.55,65.95 66.45,64.05 66.45,63.626 66.274,63.45 U216.1@65.7,63.45
NetU501_2: U501.2 U501.3 | length 0.7
  L1 (Signal) w0.3: U501.2@174.675,87.75 U501.3@175.325,87.75
NetU506_2: U506.2 U506.3 | length 0.7
  L1 (Signal) w0.3: U506.3@166.175,73 U506.2@166.825,73
PDOC_1: C501.2 J501.2 R501.2 TP501.1 U503.2 | length 23.7
  L1 (Signal) w0.3: J501.2@175.275,111.75 175.475,111.55 175.475,110.525 177.824,108.176 177.824,105.604 ; U503.2@176.275,105.5 176.379,105.604 177.824,105.604 ; TP501.1@176.5,94.5 176.276,94.724 175.326,94.724 174.5,95.55 174.5,97.4 173.857,98.043 173.857,100.65 175.026,101.819 175.026,102.365 175.661,103 176.5,103 177.824,104.324 177.824,105.604
PDOC_1_processed: U501.6 U503.4 | length 18.7
  L1 (Signal) w0.3: U503.4@173.725,106.45 173.85,106.45 175,105.3 175,104.25 174,103.25 173.25,103.25 172.25,102.25 172.25,95.655 175.303,92.602 175.303,91.273 U501.6@175.325,91.25
PDOC_2: C502.2 J502.2 R502.2 TP502.1 U504.2 | length 21
  L1 (Signal) w0.3: U504.2@172.525,65.75 174.5,65.75 174.55,65.8 ; J502.2@174.75,80.25 177.25,77.75 177.25,75.75 174.624,73.124 174.624,72.267 C502.2@174.357,72 174.55,71.807 R502.2@174.55,68.5 174.55,65.75 174.55,65.2 174.557,65.193 174.557,64.8 175.107,64.25 TP502.1@175.5,64.25
PDOC_2_processed: U504.4 U506.6 | length 5.8
  L1 (Signal) w0.3: U506.6@166.175,69.5 166.175,68.001 166.351,67.825 168.725,67.825 169.85,66.7 U504.4@169.975,66.7
PDOC_OUT: J503.1 U505.4 U507.2 | length 24.8
  L1 (Signal) w0.3: U507.2@156.75,55.5 156.8,55.55 156.8,58 ; U505.4@156.8,63.05 156.8,58 ; J503.1@173.275,56.75 173.025,56.5 167.855,56.5 166.355,58 156.8,58
Precharge_5V: C701.2 R702.2 R703.2 R705.2 TP701.1 U701.2 | length 47.2
  L1 (Signal) w0.3: R702.2@128.5,29.95 R703.2@133,29.95 145.7,29.95 C701.2@147.409,31.659 ; TP701.1@136.25,35 TP701.1@136.25,34.55 ; R705.2@137.5,40.5 134.034,40.5 131.75,38.216 U701.2@131.75,35.475 131.75,34.5 132.25,34 135.7,34 TP701.1@136.25,34.55 ; C701.2@146.75,31.357 146.215,31.892 145.858,31.892 143.813,33.937 136.976,33.937 136.912,34 136.8,34 TP701.1@136.25,34.55
Precharge_12V: J701.1 R702.1 | length 7.8
  L1 (Signal) w0.3: J701.1@128,20.475 128.193,20.668 128.193,27.743 R702.1@128.5,28.05
RESET: IC203.3 IC203.7 IC203.11 IC203.15 J107.2 R102.2 U301.1 U401.1 U501.1 U506.1 U601.1 | length 342.1
  L1 (Signal) w0.3: v1(94,115) 95.275,113.725 U301.1@100.5,113.725 ; U601.1@129.5,48.55 130.192,48.55 130.25,48.492 130.25,47.5 ; v1(154,112.25) 155.5,112.25 156.293,111.457 156.293,110.783 156.351,110.725 U401.1@156.5,110.725 ; v1(166.75,75.25) 166.856,75.25 167.475,74.631 U506.1@167.475,73 ; v1(172,87) 172.054,87 172.804,87.75 U501.1@174.025,87.75
  L1 (Signal) w0.5: IC203.3@58.63,75.25 60.88,73 v1(63.75,73) ; IC203.11@66.25,83.19 69.707,86.647 69.707,92.793 60.5,102 60.5,109 66.5,115 v1(88.25,115) ; 130.25,47.5 v1(132.5,45.25) ; v1(159.5,73.75) v1(162,76.25)
  L1 (Signal) w1: v1(81.25,62.5) 83.25,62.5 87,58.75 87,52.25 91.25,48 91.25,43.889 91.395,43.744 91.395,43.355 J107.2@91.5,43.25 97.333,43.25 97.833,43.75 104.7,43.75 R102.2@104.9,43.95 ; R102.2@105.25,43.95 R102.2@104.9,43.95 ; v1(122,44) 121.95,43.95 R102.2@104.9,43.95
  L4 (Signal) w0.3: v1@154,112.142 v1(154,112.25)
  L4 (Signal) w0.5: v1(88.25,115) v1(94,115) ; v1(132.5,45.25) 141.459,45.25 142.709,46.5 145.75,46.5 147,45.25 147,43.25 148,42.25 157.25,42.25 158.25,43.25 158.25,45.25 159.525,46.525 160.275,46.525 161.55,47.8 161.55,67.613 159.5,69.663 v1(159.5,73.75) ; v1(154,112.25) 157.5,108.75 157.5,82.75 163.875,76.375 163.875,76.25 ; v1(162,76.25) 163.875,76.25 ; v1(166.75,75.25) 165.75,76.25 ; v1(172,87) 172,86.25 165.75,80 165.75,76.25 ; 163.875,76.25 165.75,76.25
  L4 (Signal) w1: IC203.15@56.09,83.19 59.385,79.895 66.25,79.895 ; v1(63.75,73) 66.54,73 IC203.7@68.79,75.25 68.911,75.371 68.911,75.768 69,75.858 69,79.895 ; IC203.11@66.25,83.19 66.25,79.895 ; v1(81.25,62.5) 80.5,63.25 80.5,78.5 79.105,79.895 69,79.895 ; v1(122,44) 131.25,44 v1(132.5,45.25) ; 66.25,79.895 69,79.895
pads on no net: IC203.13 K201.12 K301.12 K401.12 K501.12 K601.12 K701.12 U204.5 U204.6 U204.7 U213.1 U303.1 U503.1 U504.1 U507.1 U701.1

## Polygon pours and split planes (outlines as drawn)
GND on L2 (GND) "GND_L02_P003" (solid, pour order 3): 21,121.46 cw(c23.54,121.46) 23.54,124 176.46,124 cw(c176.46,121.46) 179,121.46 179,18.54 cw(c176.46,18.54) 176.46,16 23.54,16 cw(c23.54,18.54) 21,18.54 21,122
GND on L3 (GND) "GND_L03_P004" (solid, pour order 4): 21,121.46 cw(c23.54,121.46) 23.54,124 176.46,124 cw(c176.46,121.46) 179,121.46 179,18.54 cw(c176.46,18.54) 176.46,16 23.54,16 cw(c23.54,18.54) 21,18.54 21,122

## Silkscreen, mask and mechanical layers (free items; w line width, h text height)
Top Overlay:
  drawing of 123 lines, arcs and shapes, not listed
  text "AMS_TO_ECU" at 133.004,122.954 h1.2
  text "AMS_IN" at 154.504,122.754 h1.5
  text "IMD_IN" at 108.004,122.737 h1.4
  text "IMD_TO_ECU" at 84.504,122.671 h1
  text "AMS_TP" at 165.004,122.254 h1.5
  text "BRAKE1" at 26.504,122.004 h1.24
  text "ACCUM_IN" at 54.504,121.758 h1.52
  text "BRAKE2" at 41.754,121.754 h1.24
  text "IMD" at 97.54,120.29 h2.52
  text "AMS" at 145.79,119.79 h2.52
  text "PDOC_1_IN" at 178.421,117.246 h1 r270
  text "IMD_TP" at 115.504,115.254 h1.5
  text "AMS_FAULT" at 124.754,110.921 h1
  text "INERTIA" at 75.254,110.754 h1.5
  text "IMD_FAULT" at 87.754,110.421 h1
  text "BSPD" at 52.1,110.35 h3
  text "BRAKE_DELAY_TP" at 51.504,107.421 h1
  text "B2TP" at 35.754,104.504 h1
  text "B1TP" at 23.004,104.254 h1
  text "ACCUM_TP" at 44.504,102.171 h1
  text "PDOC1_TP" at 178.211,99.746 h1.24 r270
  text "GND_TP" at 21.504,99.711 h1.24
  text "SWITCH" at 76.254,99.504 h1.5
  text "Right" at 127.754,95.154 h1.2
  text "Left" at 112.254,93.004 h1.2
  text "Shutdown Buttons" at 103.504,91.504 h1.5
  text "Cockpit" at 93.902,91.503 h1.2
  text "BRAKE" at 28.254,90.254 h1.52
  text "1" at 28.504,88.254 h1.52
  text "REF" at 28.504,86.004 h1.52
  text "OUT TO" at 98.004,85.254 h1.5
  text "PDOC_2_IN" at 178.171,85.246 h1 r270
  text "PRECHARGE" at 94.004,82.504 h1.5
  text "BRAKE" at 28.004,82.254 h1.52
  text "PDOC" at 157.96,80.54 h2.52 r90
  text "2" at 28.004,80.254 h1.52
  text "INTERLOCK_3" at 125.357,78.82 h1.2
  text "REF" at 28.254,78.004 h1.52
  text "PDOC_1" at 160.829,76.254 h1 r90
  text "ACCUM" at 28.254,74.004 h1.52
  text "FAULT" at 159.996,70.754 h1 r90
  text "PDOC2_TP" at 178.12,70.603 h1.24 r270
  text "REF" at 28.504,70.504 h1.52
  text "PDOC_2" at 158.079,70.504 h1 r90
  text "PDOC1" at 173.246,69.754 h1 r90
  text "BRAKE_MIN" at 22.754,67.961 h1.24
  text "INTERLOCK" at 95.754,64.754 h1.2
  text "INTERLOCK_1" at 108.357,64.57 h1.2
  text "REF" at 28.254,64.504 h1.52
  text "HVD" at 90.254,64.504 h1.5
  text "INTERLOCK_2" at 125.254,64.454 h1.2
  text "IMD" at 75.785,63.404 h1.5
  text "ECU" at 111.254,61.754 h1.5
  text "PDOC_TO_ECU" at 176.421,61.246 h1 r270
  text "BSPD" at 75.754,59.254 h1.5
  text "BRAKE" at 28.254,55.254 h1.24
  text "ECU" at 132.204,54.204 h1.5
  text "MAX REF" at 25.504,52.004 h1.24
  text "PRECHARGE" at 139.004,51.004 h1.3
  text "BOTS" at 96.004,50.754 h1.5
  text "PRECHARGE" at 150.754,50.254 h1.2
  text "ACCUM" at 28.004,50.004 h1.24
  text "CHARGING" at 138.754,49.254 h1.3
  text "RESET" at 87.754,46.754 h1.5
  text "MIN" at 28.254,46.254 h1.24
  text "REF" at 28.254,44.004 h1.24
  text "ACCUM" at 26.254,35.504 h1.24
  text "MAX" at 25.004,33.504 h1.24
  text "REF" at 30.004,33.504 h1.24
  text "12V_TP" at 102.254,30.461 h1.24
  text "BSPD" at 33.746,28.254 h1.24 r90
  text "ECU_TP" at 109.004,27.961 h1.24
  text "FAULT" at 35.496,27.754 h1.24 r90
  text "ACCUM" at 38.504,27.754 h1.24
  text "BRAKE1" at 46.004,27.754 h1.24
  text "BRAKE2" at 54.004,27.754 h1.24
  text "FAULT" at 54.504,26.254 h1.24
  text "FAULT" at 38.754,26.004 h1.24
  text "FAULT" at 46.504,26.004 h1.24
  text "BSPD_TO_ECU" at 31.254,16.711 h1.24
  text "GND_TP" at 46.754,16.711 h1.24
  text "5V_TP" at 56.004,16.711 h1.24
  text "GLVMS" at 83.504,16.254 h1.5
  text "TSMS" at 136.254,16.254 h1.5
  text "5V_IN" at 101.504,16.211 h1.24
  text "PRECHARGE" at 122.254,16.004 h1.24
  text "OUT_TO_AIR+" at 151.754,16.004 h1.5
  text "12V_IN" at 67.004,15.961 h1.24
  text "ECU_FAULT" at 110.754,15.961 h1.24
Mechanical 1:
  lines w0.254: 20,16.27 ccw(c21.27,16.27) 21.27,15 178.73,15 ccw(c178.73,16.27) 180,16.27 180,123.73 ccw(c178.73,123.73) 178.73,125 21.27,125 ccw(c21.27,123.73) 20,123.73 20,21 20,16.27

## Text inside footprints (layer, text, board x,y; h text height)
D101: Mechanical 13 "+" at 58.267,25.5 h1
D201: Mechanical 13 "+" at 36.25,33.067 h1 r90
D202: Mechanical 13 "+" at 42.667,33.067 h1 r90
D203: Mechanical 13 "+" at 49.083,33.067 h1 r90
D204: Mechanical 13 "+" at 55.5,33.067 h1 r90
D301: Mechanical 13 "+" at 93.517,109 h1
D401: Mechanical 13 "+" at 134.517,114.75 h1
D501: Mechanical 13 "+" at 162,80.517 h1 r90
D502: Mechanical 13 "+" at 162.75,70.483 h1 r270
D601: Mechanical 13 "+" at 131.983,51.75 h1 r180
D701: Mechanical 13 "+" at 147.25,44.733 h1 r270